# Altium PCB TESTER_REMOTE_02.PcbDoc (part 2 of 2)
Units mil, origin at the board's own origin, x right, y up, seen from the top; angles counter-clockwise.
Board outline 6191.28 x 3341.28 mil, 2 copper layers (Top Layer, Bottom Layer); 123 components, 81 nets, 444 pads, 73 vias.
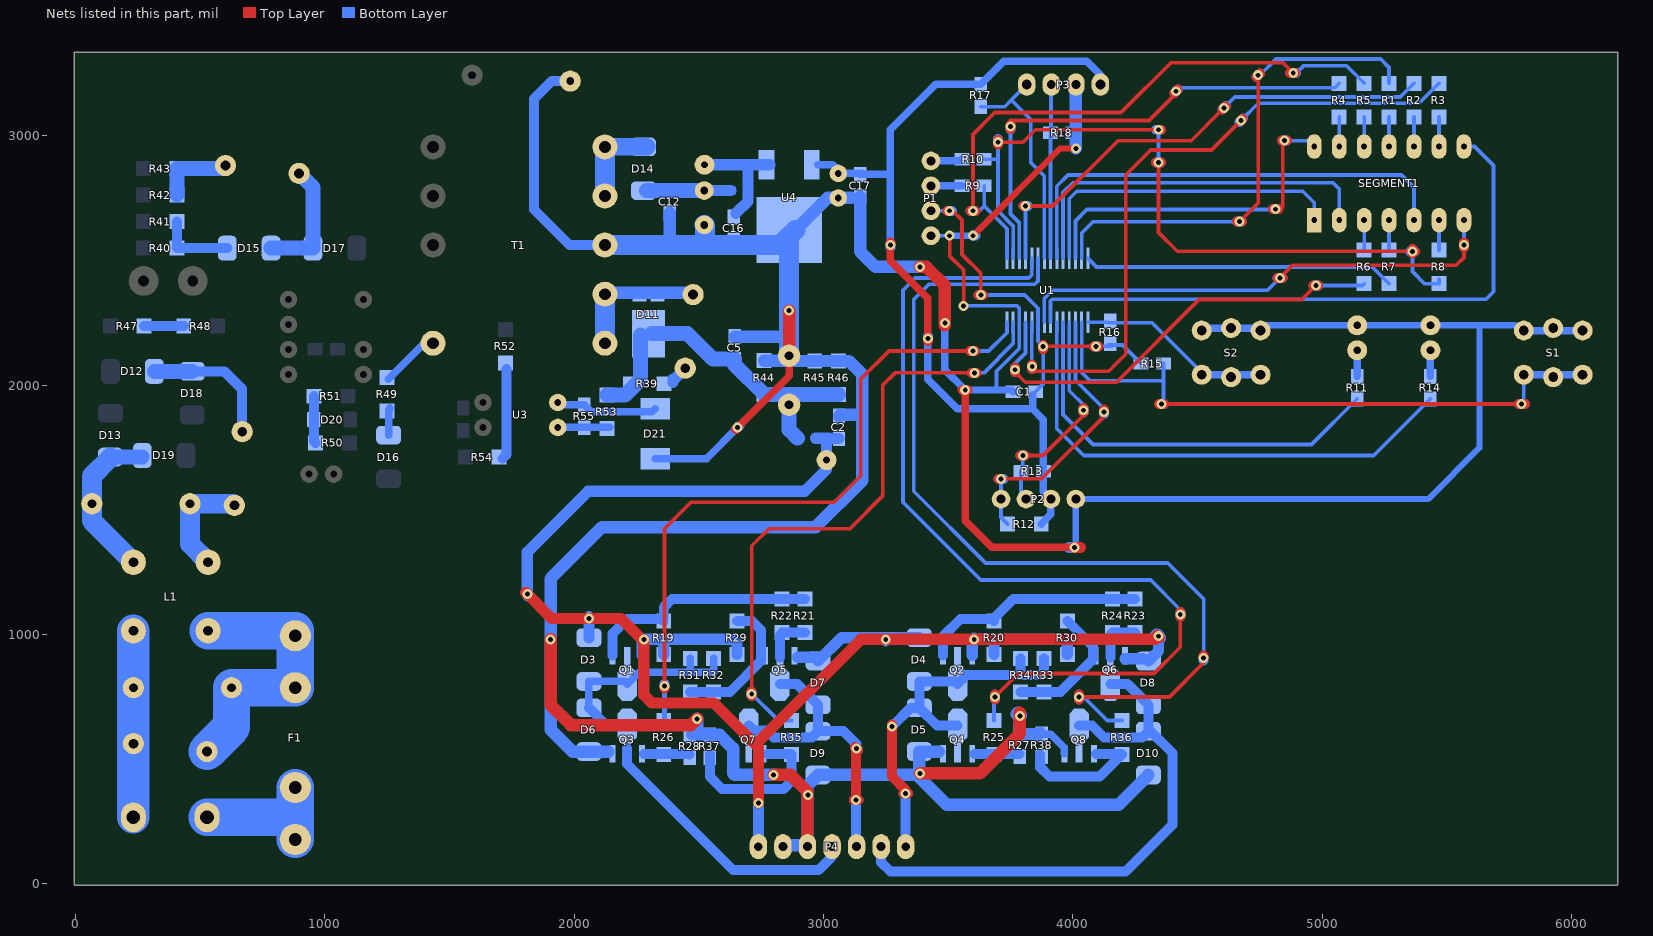
[diagram p2: the nets of this part, all layers, seen from the top]

## Via types
v1: diameter 40, hole 19.68, Top Layer to Bottom Layer, 73 vias

## Nets (pads, with @x,y where several pads share a name; then routed paths per layer and width w, separated by ;. In a path a pad name is that pad's centre, name@x,y a point inside that pad or via, vN(x,y) a via of type N, cw(c..) or ccw(c..) an arc to the next point about the centre after c; other vN are vias at no path point) (continued)
GND: C1.2 C2.2 C4.1 C5.2 C6.2 C11.2 C12.2 C16.2 C17.2 C18.2 D1.2 D2.2 D5.1 D6.1 D9.1 D10.1 D21.1 P1.1 P2.4 P3.3 P4.5 P4.6 Q3.2 Q4.2 Q7.2 Q8.2 R18.2 R27.1 R28.1 R37.1 R38.1 R44.2 R45.2 R46.2 S1.2 S2.2 T1.8 U1.12 U4.2 | length 19937.4
  Top Layer w15: v1(3506.25,2600) 3506.25,2518.75 3562.5,2462.5 v1(3562.5,2318.75)
  Top Layer w25: v1(3600,2600) 3950,2950 v1(4012.5,2950)
  Top Layer w30: v1(2656.25,1831.25) 2862.5,2037.5 C6.2@2862.5,2118.75 ; v1(3568.75,1981.25) 3568.75,1456.25 3675,1350 v1(4006.25,1350)
  Top Layer w40: v1@2649.62,1824.62 v1(2656.25,1831.25) ; v1(3487.5,2250) v1@3487.5,2259.38 ; v1@3558.75,1981.25 v1(3568.75,1981.25) v1@3578.75,1981.25
  Top Layer w45: v1(4006.25,1350) 4031.25,1350
  Top Layer w50: v1(1906.25,981.25) 1906.25,718.75 1987.5,637.5 2468.75,637.5 v1(2493.75,662.5) ; v1(2800,437.5) 2868.75,437.5 2936.22,370.03 P4.5@2936.22,187.5 ; C6.2@2862.5,2118.75 v1(2862.5,2299.8) ; v1(3387.5,443.75) 3627.9,443.75 3788.14,603.99 v1(3788.14,674.36) v1@3788.14,687.5 ; v1(3387.5,2475) 3412.5,2475 3487.5,2400 v1@3487.5,2259.38 ; v1@3487.5,2240.62 v1(3487.5,2250)
  Bottom Layer w15: P1.1@3431.25,2600 v1(3506.25,2600) ; v1(3562.5,2318.75) 3776.52,2318.75 3785.98,2309.28 U1.12@3785.98,2253.3 3785.98,2148.48 3693.75,2056.25 3693.75,1987.5
  Bottom Layer w25: v1(3506.25,2600) v1(3600,2600) ; v1(4006.25,1350) 4012.5,1356.25 P2.4@4012.5,1543.75 5425,1543.75 5631.25,1750 5631.25,2237.5 ; S2.2@4517.15,2219.83 S2.2@4526.99,2229.68 ; S2.2@4743.52,2229.68 S2.2@4753.37,2219.83 4774.28,2240.75 D1.2@5140.9,2240.75 D2.2@5434.65,2240.75 5772.83,2240.75 5793.75,2219.83 S1.2@5808.78,2219.83
  Bottom Layer w30: D21.1@2325,1706.25 2531.25,1706.25 v1(2656.25,1831.25) ; v1(3487.5,2250) 3487.5,2062.5 v1(3568.75,1981.25) 3755,1981.25 C1.2@3761.25,1975 ; R38.1@3868.75,606.25 3874.37,600.63 3911.87,600.63 3966.54,545.96 Q8.2@3966.54,521.85 ; S2.2@4526.99,2229.68 S2.2@4635.26,2229.68 S2.2@4743.52,2229.68 ; S1.2@5808.78,2219.83 S1.2@6045,2219.83
  Bottom Layer w40: C4.1@1984.6,3220.13 1910.49,3220.13 1839.65,3149.29 1839.65,2705.19 1982.29,2562.55 T1.8@2123.62,2562.55 ; v1(2656.25,1831.25) v1@2662.88,1837.88 ; v1(3600,2600) v1@3610.62,2600
  Bottom Layer w45: 3985,1350 v1(4006.25,1350) 4027.5,1350
  Bottom Layer w50: 2137.5,531.25 D6.1@2059.65,531.25 1993.75,531.25 1906.25,618.75 v1(1906.25,981.25) 1906.25,1225 2112.5,1431.25 2968.75,1431.25 3156.25,1618.75 3156.25,1900 ; 2384.65,2581.25 C12.2@2384.65,2691.25 ; R28.1@2473.39,600 2556.64,600 R37.1@2558.89,597.75 ; 2493.75,620.36 v1(2493.75,662.5) ; R37.1@2544.39,597.75 R37.1@2558.89,597.75 ; C5.2@2643.75,2195 2862.7,2195 2868.75,2195 ; R44.2@2762.5,2098.75 2842.5,2098.75 C6.2@2862.5,2118.75 2883.75,2097.5 R46.2@3060.8,2097.5 3102.5,2097.5 3156.25,2043.75 3156.25,1900 ; v1@2806.87,437.5 v1(2800,437.5) 2643.75,437.5 2637.5,443.75 2637.5,543.75 2583.5,597.75 R37.1@2558.89,597.75 ; P4.6@2837.8,156.25 2936.22,156.25 2936.22,395.07 D9.1@2978.4,437.25 v1@3375.3,437.25 ; U4.2@2887.7,2622.84 3016.44,2751.57 C18.2@3059.65,2751.57 3111.22,2751.57 ; C2.2@3062.5,1876.25 3067.5,1881.25 3137.5,1881.25 3156.25,1900 ; C17.2@3147.15,2756.25 3147.15,2537.5 3209.65,2475 v1(3387.5,2475) ; 3462.5,531.25 D5.1@3384.65,531.25 3384.65,446.6 v1@3375.3,437.25 ; v1(3788.14,674.36) 3788.14,600 3862.5,600 R38.1@3868.75,606.25 ; v1(4012.5,2950) P3.3@4012.5,3206.25 ; D10.1@4303.4,437.25 4184.9,318.75 3493.8,318.75 v1@3375.3,437.25
  Bottom Layer w60: v1@3781.25,681.25 v1@3787.5,675
  Bottom Layer w80: T1.8@2123.62,2562.55 2525,2562.55 ; C11.2@2522.15,2643.45 2525,2640.6 2525,2562.55 ; C6.2@2862.7,2118.75 2862.7,2195 U4.2@2862.7,2597.84 ; U4.2@2887.7,2622.84 U4.2@2862.7,2597.84 ; 2525,2562.55 2827.41,2562.55 U4.2@2862.7,2597.84
  other v1: 2937.5,356.25
NetC3_1: C3.1 R39.1 | length 80
  Bottom Layer w45: 2396.55,2012.5 2396.55,2025 2402.18,2025 C3.1@2445.93,2068.75
NetC3_2: C3.2 D11.1 T1.6 T1.7 | length 555.2
  Bottom Layer w50: T1.7@2123.62,2371.95 C3.2@2475.75,2371.95
  Bottom Layer w80: T1.6@2123.62,2168.85 T1.7@2123.62,2365.7 T1.7@2123.62,2371.95
NetC8_1: C8.1 L1.2 NTC1.1 | length 445.1
  Bottom Layer w80: L1.2@532.43,1290.5 459.65,1363.29 C8.1@459.65,1525 631.25,1525 NTC1.1@637.5,1518.75
NetC8_2: C8.2 D13.1 D19.2 L1.4 | length 649.2
  Bottom Layer w60: D13.1@140.95,1712.5 D19.2@268.16,1712.5
  Bottom Layer w75: D13.1@140.95,1710.5 D13.1@140.95,1712.5
  Bottom Layer w80: D13.1@140.95,1710.5 65.95,1635.5 C8.2@65.95,1525 65.95,1456.99 L1.4@232.43,1290.5
NetC9_1: C9.1 R42.1 R43.1 | length 288.2
  Bottom Layer w60: R42.1@407.15,2762.5 R43.1@407.15,2868.75 C9.1@589.13,2868.75
NetC9_2: C9.2 D15.2 D17.2 | length 491.1
  Bottom Layer w60: D15.2@784.9,2550 D17.2@952.9,2550 952.9,2794.25 C9.2@897.15,2850
NetD1_1: D1.1 R11.2 | length 105
  Bottom Layer w30: R11.2@5140.9,2035.75 D1.1@5140.9,2140.75
NetD2_1: D2.1 R14.2 | length 105
  Bottom Layer w30: R14.2@5434.65,2035.75 D2.1@5434.65,2140.75
NetD12_1: D12.1 D18.2 NTC1.2 | length 552.7
  Bottom Layer w40: D18.2@468.66,2056.25 597.15,2056.25 669,1984.4 NTC1.2@669,1814.03
  Bottom Layer w60: D12.1@316.45,2056.25 D18.2@468.66,2056.25
NetD14_1: D14.1 T1.9 T1.10 | length 364.1
  Bottom Layer w70: T1.10@2123.62,2956.25 D14.1@2290.9,2956.25
  Bottom Layer w80: T1.9@2123.62,2759.4 T1.10@2123.62,2956.25
NetD15_1: D15.1 R40.1 R41.1 | length 306
  Bottom Layer w40: R40.1@407.15,2551.25 R41.1@407.15,2656.25 ; R40.1@408.4,2550 D15.1@609.4,2550
NetD16_1: D16.1 R49.1 | length 111.8
  Bottom Layer w30: D16.1@1256.25,1800.25 1256.25,1900 1260.94,1904.69 R49.1@1260.94,1910.16
NetD20_2: D20.2 R50.2 R51.1 | length 190.1
  Bottom Layer w40: R51.1@957.5,1956.25 957.5,1775 R50.2@963.75,1768.75
NetP1_3: P1.3 R9.2 | length 123.8
  Bottom Layer w30: P1.3@3431.25,2800 R9.2@3555,2800
NetP1_4: P1.4 R10.2 | length 126.3
  Bottom Layer w30: P1.4@3431.25,2900 3548.75,2900 R10.2@3555,2906.25
NetQ1_1: Q1.1 R19.1 R21.2 R22.2 | length 955.4
  Bottom Layer w40: Q1.1@2154.04,915.9 2154.04,1004.04 2212.5,1062.5 2352.15,1062.5 R19.1@2359.65,1055 2359.65,1109.65 2392.75,1142.75 R22.2@2834.65,1142.75 R21.2@2925.59,1142.75
NetQ2_1: Q2.1 R20.1 R23.2 R24.2 | length 922.4
  Bottom Layer w40: Q2.1@3479.04,915.9 3479.04,991.54 3550,1062.5 3677.15,1062.5 R20.1@3684.65,1055 3684.65,1065.9 3761.5,1142.75 R24.2@4159.65,1142.75 R23.2@4250.59,1142.75
NetQ3_1: Q3.1 R26.1 R28.2 | length 182.7
  Bottom Layer w40: Q3.1@2281.25,522.1 2461.29,522.1 R28.2@2463.14,520.25
NetQ4_1: Q4.1 R25.1 R27.2 | length 180
  Bottom Layer w40: Q4.1@3606.25,522.1 R27.2@3786.29,522.1
NetQ5_1: Q5.1 R29.1 R31.2 R32.2 | length 571
  Bottom Layer w40: R31.2@2465.9,770.25 R32.2@2559.65,770.25 2625,770.25 2750,895.25 2750,1018.75 2713.75,1055 R29.1@2653.4,1055
NetQ6_1: Q6.1 R30.1 R33.2 R34.2 | length 540.8
  Bottom Layer w40: R34.2@3790.9,770.25 R33.2@3884.65,770.25 3950,770.25 4081.25,901.5 4081.25,952.15 R30.1@3978.4,1055
NetQ7_1: Q7.1 R35.1 R37.2 | length 656.3
  Bottom Layer w40: R37.2@2544.39,520.25 R37.2@2544.39,507.75 2544.39,430.61 2593.75,381.25 2840.9,381.25 2872.15,412.5 R35.1@2872.15,520.25 2870.55,521.85 2775,521.85
NetQ8_1: Q8.1 R36.1 R38.2 | length 536.1
  Bottom Layer w40: R38.2@3869.39,520.25 3869.39,468.11 3906.25,431.25 4108.15,431.25 R36.1@4197.15,520.25 4195.55,521.85 Q8.1@4093.75,521.85
NetR1_2: R1.2 SEGMENT1.4 | length 118.5
  Bottom Layer w15: SEGMENT1.4@5268.75,2957.78 R1.2@5268.75,3076.25
NetR2_1: R2.1 SEGMENT1.5 | length 118.5
  Bottom Layer w15: SEGMENT1.5@5368.75,2957.78 R2.1@5368.75,3076.25
NetR3_2: R3.2 SEGMENT1.6 | length 118.5
  Bottom Layer w15: SEGMENT1.6@5468.75,2957.78 R3.2@5468.75,3076.25
NetR4_1: R4.1 SEGMENT1.2 | length 118.5
  Bottom Layer w15: SEGMENT1.2@5068.75,2957.78 R4.1@5068.75,3076.25
NetR5_1: R5.1 SEGMENT1.3 | length 118.5
  Bottom Layer w15: SEGMENT1.3@5168.75,2957.78 R5.1@5168.75,3076.25
NetR6_2: R6.2 SEGMENT1.10 | length 120
  Bottom Layer w15: R6.2@5168.75,2542.5 SEGMENT1.10@5168.75,2662.5
NetR7_2: R7.2 SEGMENT1.11 | length 120
  Bottom Layer w15: R7.2@5268.75,2542.5 SEGMENT1.11@5268.75,2662.5
NetR8_2: R8.2 SEGMENT1.13 | length 120
  Bottom Layer w15: R8.2@5468.75,2542.5 SEGMENT1.13@5468.75,2662.5
NetR47_1: R47.1 R48.2 | length 158.7
  Bottom Layer w40: R47.1@275.95,2237.5 R48.2@434.65,2237.5
NetR49_2: R49.2 T1.5 | length 206.9
  Bottom Layer w30: R49.2@1254.32,2024.13 T1.5@1400.59,2170.4
NetR52_1: R52.1 R54.2 | length 366.2
  Bottom Layer w40: R54.2@1712.5,1706.25 1729.65,1723.4 R52.1@1729.65,2065.35
NULL: C10.2 L1.3 P5.2 VR1.1 | length 748
  Bottom Layer w130: P5.2@232.43,267.47 VR1.1@232.43,562.75 C10.2@232.43,787.16 L1.3@232.43,1015.5
P_7SEG_A: R5.2 R9.1 U1.15 | length 2495.2
  Top Layer w15: v1(3600,2700) 3600,3006.25 3687.5,3093.75 4193.75,3093.75 4393.75,3293.75 4843.75,3293.75 v1(4884.38,3253.12)
  Top Layer w40: v1@3590.62,2700 v1(3600,2700) v1@3609.38,2700 ; v1@4871.88,3253.12 v1@4891.88,3253.12
  Bottom Layer w15: v1(3600,2700) 3626.25,2700 3645,2718.75 ; R9.1@3645,2800 3645,2718.75 ; U1.15@3735.98,2509.2 3735.98,2627.77 3645,2718.75 ; v1(4884.38,3253.12) v1@4893.75,3253.12 ; 4906.25,3262.5 4925,3281.25 5098.75,3281.25 R5.2@5168.75,3211.25
  Bottom Layer w40: v1@3590.62,2700 v1@3610.62,2700 ; v1@4875,3253.12 v1(4884.38,3253.12) v1@4895,3253.12
P_7SEG_B: R4.2 U1.17 | length 2006.2
  Top Layer w15: 3750,3062.5 4306.25,3062.5 4414.38,3170.62 v1(4414.38,3179.38)
  Top Layer w40: v1@3750,3028.12 v1(3750,3037.5) v1@3750,3046.88 ; v1@4407.75,3172.75 v1(4414.38,3179.38) v1@4421,3186
  Bottom Layer w15: v1(3750,3037.5) 3750,2687.5 3785.98,2651.52 U1.17@3785.98,2509.2 ; v1(4414.38,3179.38) 4421,3186 4428.75,3193.75 5051.25,3193.75 R4.2@5068.75,3211.25
  Bottom Layer w40: v1@3750,3025 v1@3750,3045 ; v1@4407.75,3172.75 v1@4421.89,3186.89
P_7SEG_C: R8.1 R10.1 U1.16 | length 3058.7
  Top Layer w15: v1(3700,2975) 3800,2975 3850,3025 v1(4343.75,3025) ; v1(4343.75,2893.75) 4343.75,2612.5 4418.75,2537.5 v1(5362.5,2537.5)
  Top Layer w40: v1@3700,2965.62 v1(3700,2975) v1@3700,2984.38 ; v1@4334.38,2893.75 v1(4343.75,2893.75) v1@4353.12,2893.75 ; v1(4343.75,3025) v1@4353.12,3025 ; v1@5362.5,2528.12 v1(5362.5,2537.5) ; v1@5362.5,2546.88 v1(5362.5,2537.5) ; v1@5371.88,2537.5 v1(5362.5,2537.5)
  Bottom Layer w15: R10.1@3645,2906.25 3700,2906.25 ; v1(3700,2975) 3700,2906.25 ; U1.16@3760.98,2509.2 3760.98,2639.02 3700,2700 3700,2906.25 ; v1(4343.75,2893.75) v1(4343.75,3025) ; v1(5362.5,2537.5) 5362.5,2456.25 5411.25,2407.5 R8.1@5468.75,2407.5 R8.1@5468.75,2425
  Bottom Layer w40: v1@3700,2968.75 v1@3700,2988.75 ; v1@4334.38,2893.75 v1(4343.75,2893.75) v1@4353.12,2893.75 ; v1@4334.38,3025 v1(4343.75,3025) v1@4353.12,3025 ; v1@5353.12,2537.5 v1(5362.5,2537.5) ; v1@5362.5,2546.88 v1(5362.5,2537.5) ; v1@5371.88,2537.5 v1(5362.5,2537.5)
P_7SEG_COM_1: SEGMENT1.1 U1.26 | length 1476.9
  Top Layer w15: 4832.5,2706.25 4842.22,2715.97 4842.22,2981.25 v1(4849.24,2981.25)
  Top Layer w40: v1@4803.12,2706.25 v1(4812.5,2706.25) ; v1@4806.25,2706.25 v1@4826.25,2706.25 ; v1@4839.86,2981.25 v1@4842.22,2981.25 ; v1(4849.24,2981.25) v1@4858.61,2981.25
  Bottom Layer w15: U1.26@4010.98,2509.2 4010.98,2659.47 4056.25,2704.73 4810.98,2704.73 v1(4812.5,2706.25) ; v1(4849.24,2981.25) 4945.28,2981.25 SEGMENT1.1@4968.75,2957.78
  Bottom Layer w40: v1@4803.12,2706.25 v1@4823.12,2706.25 ; v1(4812.5,2706.25) v1@4821.88,2706.25 ; v1@4839.86,2981.25 v1@4859.86,2981.25
P_7SEG_COM_2: SEGMENT1.8 U1.25 | length 1323.5
  Bottom Layer w15: U1.25@3985.98,2509.2 3985.98,2748.48 4016.25,2778.75 4922.09,2778.75 4968.75,2732.09 SEGMENT1.8@4968.75,2662.5
P_7SEG_COM_3: SEGMENT1.9 U1.24 | length 1523.6
  Bottom Layer w15: U1.24@3960.98,2509.2 3960.98,2773.48 4000,2812.5 5043.75,2812.5 5068.75,2787.5 SEGMENT1.9@5068.75,2662.5
P_7SEG_COM_4: SEGMENT1.12 U1.23 | length 1892.8
  Bottom Layer w15: U1.23@3935.98,2509.2 3935.98,2798.48 3981.25,2843.75 3993.75,2843.75 5318.75,2843.75 5368.75,2793.75 SEGMENT1.12@5368.75,2662.5
P_7SEG_COM_5: SEGMENT1.14 U1.8 | length 2070.9
  Top Layer w15: v1(4831.25,2431.25) 4881.25,2481.25 5537.5,2481.25 5568.75,2512.5 v1(5568.75,2562.5)
  Top Layer w40: v1@4821.88,2431.25 v1@4840.62,2431.25 ; v1@5568.75,2553.12 v1@5568.75,2571.88
  Bottom Layer w15: U1.8@3885.98,2253.3 3885.98,2348.48 3918.75,2381.25 4781.25,2381.25 v1(4831.25,2431.25) ; v1(5568.75,2562.5) SEGMENT1.14@5568.75,2662.5
  Bottom Layer w40: v1@4821.88,2431.25 v1@4840.62,2431.25 ; v1@5568.75,2553.12 v1@5568.75,2571.88
P_7SEG_COM_6: SEGMENT1.7 U1.7 | length 2533.3
  Bottom Layer w15: U1.7@3910.98,2253.3 3910.98,2338.13 3917.68,2344.82 5657.32,2344.82 5687.5,2375 5687.5,2881.25 5610.97,2957.78 SEGMENT1.7@5568.75,2957.78
P_7SEG_D: R6.1 U1.11 | length 1857.7
  Top Layer w15: v1@3768.75,2053.12 3809.38,2012.5 4175,2012.5 4506.25,2343.75 4918.75,2343.75 v1(4975,2400)
  Top Layer w40: v1@3768.75,2053.12 v1(3768.75,2062.5) v1@3768.75,2071.88 ; v1@4965.62,2400 v1(4975,2400) v1@4984.38,2400
  Bottom Layer w15: v1@3756.25,2075 3810.98,2129.73 U1.11@3810.98,2253.3 ; v1(4975,2400) 5161.25,2400 R6.1@5168.75,2407.5
  Bottom Layer w40: v1@3768.75,2053.12 v1(3768.75,2062.5) v1@3768.75,2071.88 ; v1@4965.62,2400 v1@4985.62,2400
P_7SEG_DOT: R7.1 U1.28 | length 1249.9
  Bottom Layer w15: U1.28@4060.98,2509.2 4095.19,2475 5201.25,2475 R7.1@5268.75,2407.5
P_7SEG_E: R3.1 U1.10 | length 2773.6
  Top Layer w15: v1@3837.5,2056.25 4143.75,2056.25 4156.25,2068.75 4168.75,2081.25 4212.5,2125 4212.5,2843.75 4312.5,2943.75 4556.25,2943.75 v1(4675,3062.5)
  Top Layer w40: v1@3837.5,2065.62 v1(3837.5,2075) v1@3837.5,2084.38 ; v1(4675,3062.5) v1@4681.63,3069.13
  Bottom Layer w15: v1@3835.98,2073.48 U1.10@3835.98,2253.3 ; v1(4675,3062.5) 4743.75,3131.25 5388.75,3131.25 R3.1@5468.75,3211.25
  Bottom Layer w40: v1@3837.5,2065.62 v1(3837.5,2075) v1@3837.5,2080.62 ; v1@4668.37,3055.87 v1@4682.51,3070.01
P_7SEG_F: R2.2 U1.18 | length 2024.9
  Top Layer w15: v1(3810.98,2718.75) 3918.75,2718.75 4181.25,2981.25 4475,2981.25 v1@4596.88,3103.12
  Top Layer w40: v1@3801.61,2718.75 v1(3810.98,2718.75) ; v1@4599.62,3105.87 v1(4606.25,3112.5) v1@4612.88,3119.13
  Bottom Layer w15: U1.18@3810.98,2509.2 v1(3810.98,2718.75) ; v1(4606.25,3112.5) 4650,3156.25 5313.75,3156.25 R2.2@5368.75,3211.25
  Bottom Layer w40: v1@3801.61,2718.75 v1(3810.98,2718.75) v1@3820.36,2718.75 ; v1@4599.62,3105.87 v1@4613.76,3120.01
P_7SEG_G: R1.1 U1.27 | length 2076.5
  Top Layer w15: v1(4668.75,2656.25) 4743.75,2731.25 v1(4743.75,3243.75)
  Top Layer w40: v1@4659.38,2656.25 v1@4678.12,2656.25 ; v1@4737.12,3237.12 v1@4750.38,3250.38
  Bottom Layer w15: U1.27@4035.98,2509.2 4035.98,2610.98 4081.25,2656.25 v1(4668.75,2656.25) ; v1(4743.75,3243.75) 4750,3243.75 4815,3308.75 5235,3308.75 5268.75,3275 5268.75,3221.25 R1.1@5268.75,3211.25
  Bottom Layer w40: v1@4659.38,2656.25 v1@4678.12,2656.25 ; v1@4737.12,3237.12 v1@4750.38,3250.38
P_DETECTIONPIN1: P3.1 R17.2 U1.21 | length 910.7
  Bottom Layer w15: R17.2@3631.25,3117.5 3726.9,3117.5 3753.15,3143.75 ; P3.1@3815.65,3206.25 3753.15,3143.75 ; U1.21@3885.98,2509.2 3885.98,2839.02 3831.25,2893.75 3831.25,3065.65 3753.15,3143.75
P_DETECTIONPIN2: P3.2 R18.1 U1.22 | length 718.2
  Bottom Layer w15: U1.22@3910.98,2509.2 3910.98,2999.73 3912.35,3012.38 R18.1@3912.5,3013.75 ; P3.2@3912.5,3206.25 R18.1@3912.5,3013.75 ; R18.1@3918.75,3006.25 3912.6,3013.63 R18.1@3912.5,3013.75 ; R18.1@3923.75,3012.5 R18.1@3912.5,3013.75
P_KEY_1: R15.1 S1.1 U1.2 | length 2545.8
  Top Layer w15: v1@4368.75,1925 5775,1925
  Top Layer w40: v1@4346.88,1925 v1(4356.25,1925) v1@4365.62,1925 ; v1@5790.62,1925 v1(5800,1925) v1@5813.75,1925
  Bottom Layer w15: U1.2@4035.98,2253.3 4035.98,2051.52 4068.75,2018.75 4363.75,2018.75 ; v1@4363.75,1925 4363.75,2018.75 ; R15.1@4363.75,2087.5 4363.75,2018.75 ; v1@5808.78,1925 S1.1@5808.78,2042.67
  Bottom Layer w30: S1.1@5808.78,2042.67 S1.1@6045,2042.67
  Bottom Layer w40: v1@4351.25,1925 v1(4356.25,1925) 4363.75,1925 v1@4366.25,1925 ; v1@5790.62,1925 v1(5800,1925) 5808.78,1925 v1@5813.75,1925
P_KEY_2: R16.1 S2.1 U1.1 | length 795.2
  Bottom Layer w15: U1.1@4060.98,2253.3 4141.7,2253.3 4143.75,2251.25 4317.5,2251.25 4511.98,2056.77 4511.98,2037.5 S2.1@4517.15,2042.67
  Bottom Layer w30: S2.1@4517.15,2042.67 S2.1@4753.37,2042.67
P_LED_1: R11.1 U1.5 | length 1676.2
  Bottom Layer w15: U1.5@3960.98,2253.3 3960.98,1882.77 4081.25,1762.5 4957.65,1762.5 R11.1@5140.9,1945.75
P_LED_2: R14.1 U1.6 | length 2064.1
  Bottom Layer w15: U1.6@3935.98,2253.3 3935.98,1826.52 4043.75,1718.75 5207.65,1718.75 R14.1@5434.65,1945.75
P_STEPM1: R26.2 U1.14 | length 2787.4
  Top Layer w15: v1(2362.5,793.75) 2362.5,1425 2468.75,1531.25 3043.75,1531.25 3150,1637.5 3150,2025 3262.5,2137.5 v1(3600,2137.5)
  Top Layer w40: v1@2362.5,784.38 v1(2362.5,793.75) ; v1@3587.5,2137.5 v1@3607.5,2137.5
  Bottom Layer w15: R26.2@2359.65,655.25 R26.2@2362.5,658.1 ; v1(3600,2137.5) 3662.5,2137.5 3735.98,2210.98 U1.14@3735.98,2253.3
  Bottom Layer w20: R26.2@2362.5,658.1 v1(2362.5,793.75)
  Bottom Layer w40: v1(2362.5,793.75) v1@2362.5,803.12 ; v1@3590.62,2137.5 v1(3600,2137.5)
P_STEPM2: R35.2 U1.13 | length 2604.5
  Top Layer w15: v1(2712.5,762.5) 2712.5,771.88 2712.5,1356.25 2781.25,1425 3106.25,1425 3237.5,1556.25 3237.5,2000 3287.5,2050 3596.88,2050 v1(3606.25,2050)
  Top Layer w40: v1(2712.5,762.5) 2712.5,753.12 v1@2712.5,771.88 ; v1@3593.75,2050 v1@3613.75,2050
  Bottom Layer w15: v1(2712.5,762.5) 2819.75,655.25 R35.2@2872.15,655.25 ; v1(3606.25,2050) 3643.75,2050 3760.98,2167.23 U1.13@3760.98,2253.3
  Bottom Layer w40: v1@2712.5,753.12 v1(2712.5,762.5) v1@2712.5,771.88 ; v1@3596.88,2050 v1(3606.25,2050)
P_STEPM3: R25.2 U1.19 | length 3886.1
  Top Layer w15: v1(3687.5,750) 3781.25,843.75 4325.9,843.75 4431.25,949.1 v1@4431.25,1068.75
  Top Layer w40: v1@3687.5,740.62 v1@3687.5,759.38 ; v1@4431.25,1071.88 v1@4431.25,1090.62
  Bottom Layer w15: R25.2@3684.65,655.25 3684.65,747.15 v1(3687.5,750) ; U1.19@3835.98,2509.2 3835.98,2442.23 3823.75,2430 3367.5,2430 3318.75,2381.25 3318.75,1531.25 3631.25,1218.75 4312.5,1218.75 4431.25,1100 v1(4431.25,1081.25)
  Bottom Layer w40: v1@3687.5,740.62 v1@3687.5,759.38 ; v1@4431.25,1071.88 v1@4431.25,1090.62
P_STEPM4: R36.2 U1.20 | length 3810.7
  Top Layer w15: v1(4025,750) 4387.5,750 4525,887.5 4525,896.88 v1(4525,906.25)
  Top Layer w40: v1@4025,740.62 v1(4025,750) v1@4025,759.38 ; v1(4525,906.25) v1@4525,915.62
  Bottom Layer w15: U1.20@3860.98,2509.2 3860.98,2418.75 3847.23,2405 3423.75,2405 3362.5,2343.75 3362.5,1575 3650,1287.5 4381.25,1287.5 4525,1143.75 4525,915.62 v1(4525,906.25) ; v1(4025,750) 4043.75,750 4138.5,655.25 R36.2@4197.15,655.25
  Bottom Layer w40: v1@4025,740.62 v1(4025,750) v1@4025,759.38 ; v1@4525,896.88 v1(4525,906.25)
PHASE: C10.1 F1.2 L1.1 VR1.2 | length 1130.5
  Bottom Layer w150: VR1.2@527.71,531.25 626.13,629.68 C10.1@626.13,787.16 F1.2@882.04,787.15 F1.2@882.04,995.82 882.04,1015.5 L1.1@532.43,1015.5
PHASE_IN: F1.1 P5.1 | length 555.5
  Bottom Layer w150: P5.1@527.71,267.47 874.51,267.47 ; F1.1@882.04,178.49 F1.1@882.04,387.15
PI2C_SCK: P2.2 R13.1 U1.4 | length 968.4
  Top Layer w15: v1(3800,1718.75) 3881.25,1718.75 4043.75,1881.25 v1(4043.75,1900)
  Top Layer w40: v1@3790.62,1718.75 v1@3809.38,1718.75 ; v1@4043.75,1890.62 v1@4043.75,1909.38
  Bottom Layer w15: v1(3800,1718.75) 3800,1663.75 R13.1@3792.5,1656.25 3792.5,1563.75 P2.2@3812.5,1543.75 ; U1.4@3985.98,2253.3 3985.98,1978.48 4043.75,1920.71 v1(4043.75,1900)
  Bottom Layer w40: v1@3790.62,1718.75 v1@3809.38,1718.75 ; v1@4043.75,1890.62 v1@4043.75,1909.38
PI2C_SDA: P2.1 R12.1 U1.3@4010.98,2253.3 | length 1180.6
  Top Layer w15: v1(3712.5,1625) 3721.88,1625 3875,1625 4125,1875 4125,1884.38 v1(4125,1893.75)
  Top Layer w40: v1@3703.12,1625 v1(3712.5,1625) ; v1(4125,1893.75) v1@4125,1903.12
  Bottom Layer w15: v1(3712.5,1625) P2.1@3712.5,1543.75 3712.5,1470 R12.1@3738.75,1443.75 ; U1.3@4010.98,2253.3 4010.98,2020.27 4125,1906.25 v1(4125,1893.75)
  Bottom Layer w40: v1@3703.12,1625 v1(3712.5,1625) v1@3721.88,1625 ; v1@4125,1884.38 v1(4125,1893.75)
STEPM1: D7.1 D9.2 P4.3 Q5.3 Q7.3 R21.1 R22.1 | length 1451.6
  Top Layer w40: v1@3121.88,337.5 v1@3140.62,337.5 ; v1@3126.44,550.38 v1@3139.7,537.12 ; v1(3131.25,337.5) 3131.25,541.93 v1(3133.07,543.75)
  Bottom Layer w40: Q7.3@2700.59,636.02 2720.84,615.77 2772.02,615.77 2800.05,587.75 2953.4,587.75 D9.2@2978.4,612.75 ; Q5.3@2825.59,801.48 2895.42,801.48 D7.1@2978.4,718.5 D9.2@2978.4,612.75 ; Q5.3@2825.59,907.78 2825.59,998.69 R22.1@2834.65,1007.75 R21.1@2925.59,1007.75 ; v1@3121.88,337.5 v1@3140.62,337.5 ; v1@3126.44,550.38 v1@3139.7,537.12 ; v1@3131.25,346.88 3131.25,151.82 P4.3@3133.07,150 ; v1@3133.07,560.68 3081,612.75 D9.2@2978.4,612.75
STEPM2: D3.1 D6.2 P4.4 Q1.3 Q3.3 R31.1 R32.1 | length 2046.2
  Bottom Layer w30: D6.2@2059.65,706.75 D3.1@2059.65,812.25 2202.57,812.25 Q1.3@2213.09,801.73 2261.37,850 2465.9,850 ; R31.1@2465.9,905.25 2465.9,850 ; R32.1@2559.65,905.25 2559.65,850 2465.9,850
  Bottom Layer w40: D6.2@2059.65,706.75 2130.12,636.27 Q3.3@2213.09,636.27 ; Q3.3@2212.5,543.75 2212.5,481.25 2637.5,56.25 2981.25,56.25 3034.65,109.65 P4.4@3034.65,150
STEPM3: D8.1 D10.2 P4.2 Q6.3 Q8.3 R23.1 R24.1 | length 2540.6
  Bottom Layer w40: P4.2@3231.5,150 3231.5,87.12 3268.62,50 4212.5,50 4400,237.5 4400,525 4312.25,612.75 D10.2@4303.4,612.75 ; Q8.3@4025.59,636.02 4076.78,636.02 4125.05,587.75 4278.4,587.75 D10.2@4303.4,612.75 ; Q6.3@4150.59,801.48 4220.42,801.48 D8.1@4303.4,718.5 D10.2@4303.4,612.75 ; Q6.3@4150.59,907.78 4150.59,998.69 R24.1@4159.65,1007.75 R23.1@4250.59,1007.75
STEPM4: D4.1 D5.2 P4.1 Q2.3 Q4.3 R33.1 R34.1 | length 1665.9
  Top Layer w40: v1@3275,621.88 v1@3275,640.62 ; v1(3275,631.25) 3275,431.25 3329.92,376.33 v1(3329.92,362.5) ; v1@3320.55,362.5 v1@3339.3,362.5
  Bottom Layer w40: v1@3275,621.88 v1@3275,640.62 ; v1(3275,631.25) 3350.5,706.75 D5.2@3384.65,706.75 ; v1@3320.55,362.5 v1@3339.3,362.5 ; P4.1@3329.92,150 v1(3329.92,362.5) ; v1@3329.92,353.12 v1@3329.92,371.88 ; Q4.3@3538.09,636.27 3455.13,636.27 D5.2@3384.65,706.75 ; 3790.9,843.75 R34.1@3790.9,905.25 ; R33.1@3884.65,905.25 3884.65,853.4 3868.75,837.5 3573.87,837.5 Q2.3@3538.09,801.73 3527.57,812.25 D4.1@3384.65,812.25 D5.2@3384.65,706.75
V8: C16.1 J2.2 P7.1 U4.1 | length 475.2
  Bottom Layer w45: P7.1@2523.28,2884.65 J2.2@2628.6,2884.65 2697.15,2884.65 ; C16.1@2649.97,2690.33 2697.15,2737.5 2697.15,2884.65 ; U4.1@2784.65,2884.65 2697.15,2884.65
V8_IN: C11.1 C12.1 D14.2 J2.1 | length 337
  Bottom Layer w45: C11.1@2522.15,2781.25 J2.1@2628.4,2781.25
  Bottom Layer w60: D14.2@2290.9,2780.75 C11.1@2521.65,2780.75
V24: C2.1 D3.2 D4.2 D7.2 D8.2 J1.2 P4.7 P6.1 Q1.2 Q2.2 Q5.2 Q6.2 R19.2 R20.2 R29.2 R30.2 | length 7395.9
  Top Layer w40: v1@4337.12,1000.38 v1(4343.75,993.75) v1@4350.38,987.12
  Top Layer w45: v1@1806.25,1168.75 v1(1812.5,1162.5) 1909.65,1065.35 v1(2059.65,1065.35) 2187.5,1065.35 2273.03,979.82 v1(2279.82,979.82) 2279.82,757.54 2311.44,725.93 2561.57,725.93 2728.12,559.38 ; v1(2739.37,325) 2739.37,545.62 ; 2739.37,548.13 2728.12,559.38 ; v1(4343.75,993.75) 4331.25,981.25 3606.25,981.25 v1(3604.82,979.82) 3603.4,981.25 v1(3250,981.25) 3150,981.25 2728.12,559.38
  Bottom Layer w40: v1@1805.87,1169.13 v1(1812.5,1162.5) ; v1@1812.5,1153.12 v1(1812.5,1162.5) ; v1@1812.5,1171.88 v1(1812.5,1162.5) ; v1@1819.13,1155.87 v1(1812.5,1162.5) ; v1@2059.65,1055.98 v1(2059.65,1065.35) v1@2059.65,1074.73 ; v1@2279.82,970.45 v1(2279.82,979.82) ; v1@3250,971.88 v1(3250,981.25) 3250,987.75 v1@3250,990.62 ; v1@3604.82,970.45 v1(3604.82,979.82) v1@3604.82,989.2
  Bottom Layer w45: v1@1812.5,1171.88 1812.5,1331.25 2056.25,1575 2925,1575 3012.5,1662.5 P6.1@3012.5,1700 J1.2@3012.5,1786.25 ; D3.2@2059.65,987.75 v1@2059.65,1055.98 ; Q1.2@2272.15,915.9 2272.15,972.15 v1(2279.82,979.82) 2281.25,981.25 2359.65,981.25 ; R19.2@2359.65,920 2359.65,981.25 ; R29.2@2653.4,920 2653.4,965.35 2637.5,981.25 2359.65,981.25 ; P4.7@2739.37,150 v1(2739.37,325) ; 2897.15,909.4 D7.2@2969.25,909.4 ; D7.2@2978.4,894 3072.15,987.75 3250,987.75 D4.2@3350.25,987.75 ; C2.1@3062.5,1786.25 3020.55,1786.25 ; v1(3250,981.25) 3343.75,981.25 D4.2@3350.25,987.75 ; D4.2@3384.65,987.75 D4.2@3350.25,987.75 ; Q2.2@3597.15,915.9 3597.15,972.15 v1(3604.82,979.82) 3606.25,981.25 3684.65,981.25 R20.2@3684.65,920 ; 3687.5,981.25 3962.5,981.25 3978.4,965.35 R30.2@3978.4,920 ; Q6.2@4209.65,903.15 D8.2@4281.75,903.15 ; D8.2@4303.4,894 4343.75,934.35 4343.75,987.5 v1(4343.75,993.75) ; J1.2@3012.5,1786.25 2970,1786.25 2968.75,1787.5 J1.2@3000,1787.5 3021.79,1787.5 3020.55,1786.25 ; J1.2@3012.5,1786.25 3020.55,1786.25
  Bottom Layer w60: v1@4337.5,993.75 v1@4343.75,987.5
V24_IN: C5.1 C6.1 D11.2 J1.1 R39.2 R44.1 R45.1 R46.1 R53.2 | length 1396.3
  Bottom Layer w60: R53.2@2131.25,1961.25 2205,1961.25 2267.18,2023.43 D11.2@2267.18,2201 ; D11.2@2310.93,2207.25 2455.25,2207.25 2557.5,2105 C5.1@2643.75,2105 2643.75,2082.5 R44.1@2762.5,1963.75 C6.1@2856.25,1963.75 ; J1.1@2896.23,1787.7 2862.5,1821.43 C6.1@2862.5,1921.9 2862.5,1957.5 C6.1@2856.25,1963.75 ; R46.1@3060.8,1962.5 3059.55,1963.75 C6.1@2856.25,1963.75
VCC: C1.1 C17.1 C18.1 P1.2 P2.3 P3.4 R12.2 R13.2 R15.2 R16.2 R17.1 U1.9 U4.3 | length 5105.4
  Top Layer w15: v1(3506.25,2700) 3518.75,2700 3556.25,2662.5 3556.25,2525 3631.25,2450 v1(3631.25,2362.5) ; v1(3881.25,2156.25) v1@4075,2156.25
  Top Layer w30: v1(3268.75,2562.5) 3268.75,2500 3418.75,2350 v1(3418.75,2187.5)
  Top Layer w40: v1(3268.75,2562.5) v1@3268.75,2571.88 ; v1@3418.75,2178.12 v1(3418.75,2187.5) ; v1@3496.88,2700 v1(3506.25,2700) ; v1@3621.88,2362.5 v1(3631.25,2362.5) v1@3640.62,2362.5 ; v1@3881.25,2143.75 v1(3881.25,2156.25) v1@3881.25,2162.5 ; v1@4084.38,2155 v1(4093.75,2155) v1@4103.12,2155
  Bottom Layer w15: P1.2@3431.25,2700 v1@3506.25,2700 ; v1(3631.25,2362.5) 3807.92,2362.5 3860.98,2309.44 U1.9@3860.98,2253.3 3860.98,2176.52 v1(3881.25,2156.25) 3881.25,2005 C1.1@3851.25,1975 C1.1@3838.75,1962.5 ; v1(4093.75,2155) 4095,2156.25 R16.2@4156.25,2156.25 ; R16.2@4143.75,2161.25 4200,2161.25 R15.2@4273.75,2087.5
  Bottom Layer w30: U4.3@2978.25,2884.65 3037.5,2884.65 3065.9,2856.25 3072.15,2850 C17.1@3155.9,2850 ; C17.1@3147.15,2846.25 3268.75,2846.25 ; v1(3268.75,2562.5) 3268.75,2846.25 ; v1(3418.75,2187.5) 3418.75,2025 3537.5,1906.25 3837.5,1906.25 3838.75,1905 ; C1.1@3838.75,1962.5 3838.75,1905 ; R12.2@3873.75,1443.75 3912.5,1482.5 P2.3@3912.5,1543.75 3882.5,1573.75 R13.2@3882.5,1656.25 3882.5,1861.25 3838.75,1905 ; P3.4@4110.93,3206.25 4110.93,3245.32 4056.25,3300 3723.75,3300 R17.1@3631.25,3207.5 3451.25,3207.5 3268.75,3025 3268.75,2846.25
  Bottom Layer w40: C18.1@3059.65,2850 C18.1@3065.9,2856.25 ; v1@3268.75,2553.12 v1(3268.75,2562.5) ; v1(3418.75,2187.5) v1@3418.75,2196.88 ; v1@3496.88,2700 v1(3506.25,2700) v1@3515.62,2700 ; v1@3621.88,2362.5 v1(3631.25,2362.5) ; v1(3881.25,2156.25) v1@3881.25,2160.62 ; v1@4084.38,2155 v1(4093.75,2155) v1@4103.12,2155
VFB: R53.1 R55.2 U3.1 | length 208.8
  Bottom Layer w30: U3.1@1934.65,1831.25 2053.4,1831.25 R53.1@2143.4,1831.25
VFB_2: D21.2 R55.1 U3.2 | length 396.9
  Bottom Layer w30: U3.2@1944.65,1921.25 R55.1@2040.9,1921.25 2068.4,1893.75 2312.5,1893.75 D21.2@2325,1906.25
pads on no net: C1.0 C2.0 C5.0 C12.0 C14.0 C15.0 C16.0 C17.0 D3.0 D4.0 D5.0 D6.0 D7.0 D8.0 D9.0 D10.0 D11.0 D12.0 D13.0 D14.0 D15.0 D16.0 D17.0 D18.0 D19.0 D20.0 D21.0 Q1.0 Q2.0 Q3.0 Q4.0 Q5.0 Q6.0 Q7.0 Q8.0 R1.0 R2.0 R3.0 R4.0 R5.0 R6.0 R7.0 R8.0 R9.0 R10.0 R11.0 R12.0 R13.0 R14.0 R15.0 R16.0 R17.0 R18.0 R19.0 R20.0 R21.0 R22.0 R23.0 R24.0 R25.0 R26.0 R27.0 R28.0 R29.0 R30.0 R31.0 R32.0 R33.0 R34.0 R35.0 R36.0 R37.0 R38.0 R39.0 R40.0 R41.0 R42.0 R43.0 R44.0 R45.0 R46.0 R47.0 R48.0 R49.0 R50.0 R51.0 R52.0 R53.0 R54.0 R55.0 U1.0 U1.3@3809.47,2381.25 U1.3@3898.48,2381.25 U1.3@3987.5,2381.25 U4.0

## Keep-outs
Keep-Out Layer:
  lines w10: 0,0 0,3331.25 966.45,3331.25 6181.25,3331.25 6181.25,0 0,0

## Other copper
Top Layer:
  text "Programming" at 3443.75,2981.25 h60 r90
  text "Module" at 4031.25,1612.5 h60
  text "TESTER_REMOTE_CONTROLLER_01" at 4812.5,587.5 h70
  text "PARLAR" at 4812.5,143.75 h250

## Text inside footprints (layer, text, board x,y; h text height)
C6: Top Overlay "+" at 3195.9,1802.42 h60 r180
C7: Top Overlay "+" at 151.95,2038.45 h78.74 r90
C11: Top Overlay "+" at 2296.05,2846.15 h50
C13: Top Overlay "+" at 1102.61,1805.45 h40 r270
C18: Top Overlay "+" at 2897.95,2916.69 h40